# Altium PCB RGBlink.PcbDoc (part 1 of 2)
Units mm, origin at the board's own origin, x right, y up, seen from the top; angles counter-clockwise.
Board outline 49.44 x 43.42 mm, 2 copper layers (Top Layer, Bottom Layer), stack 1.621 mm thick; 48 components, 43 nets, 170 pads, 158 vias.
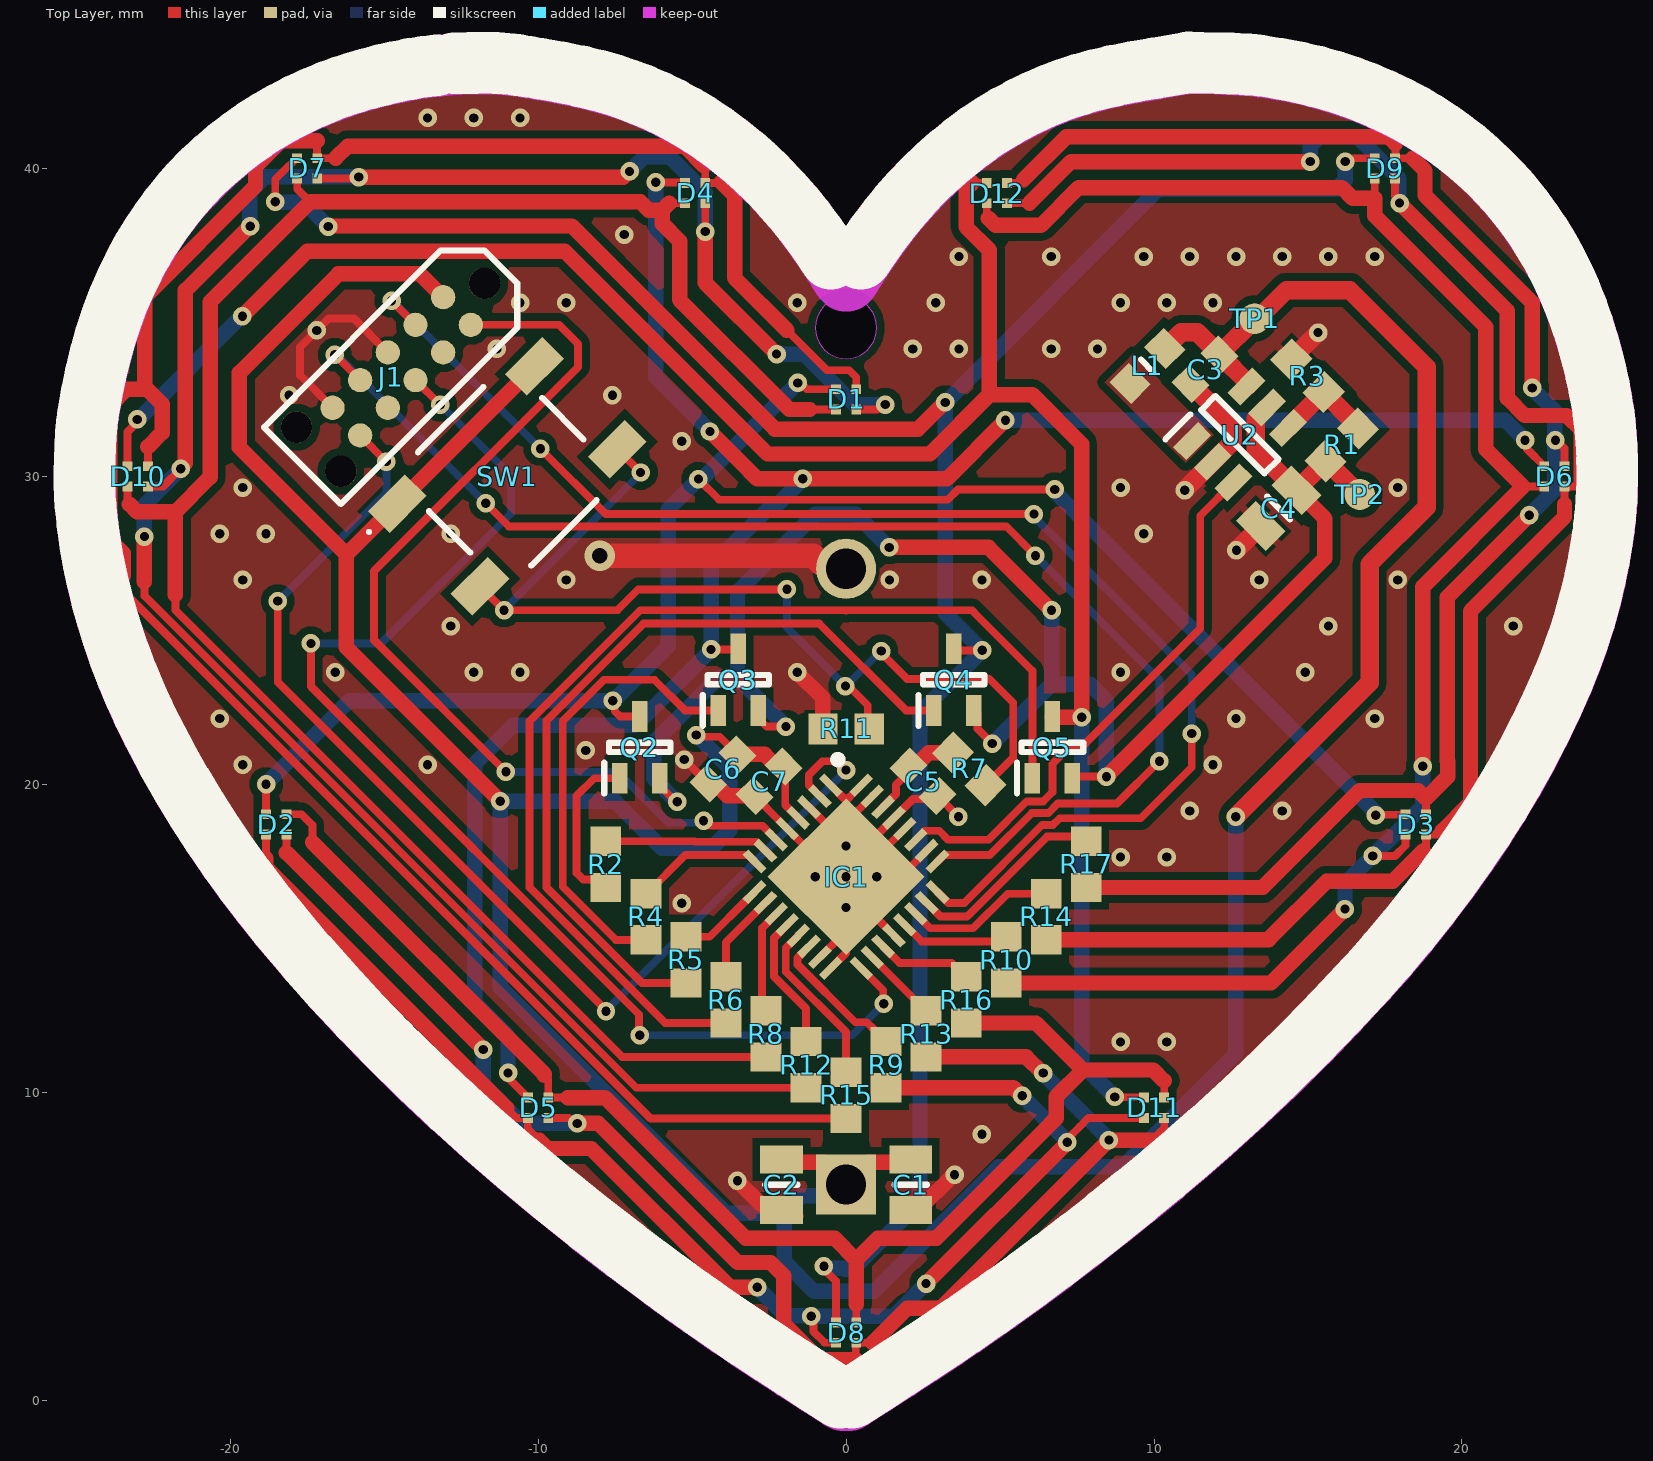
[diagram p0: Top Layer view]
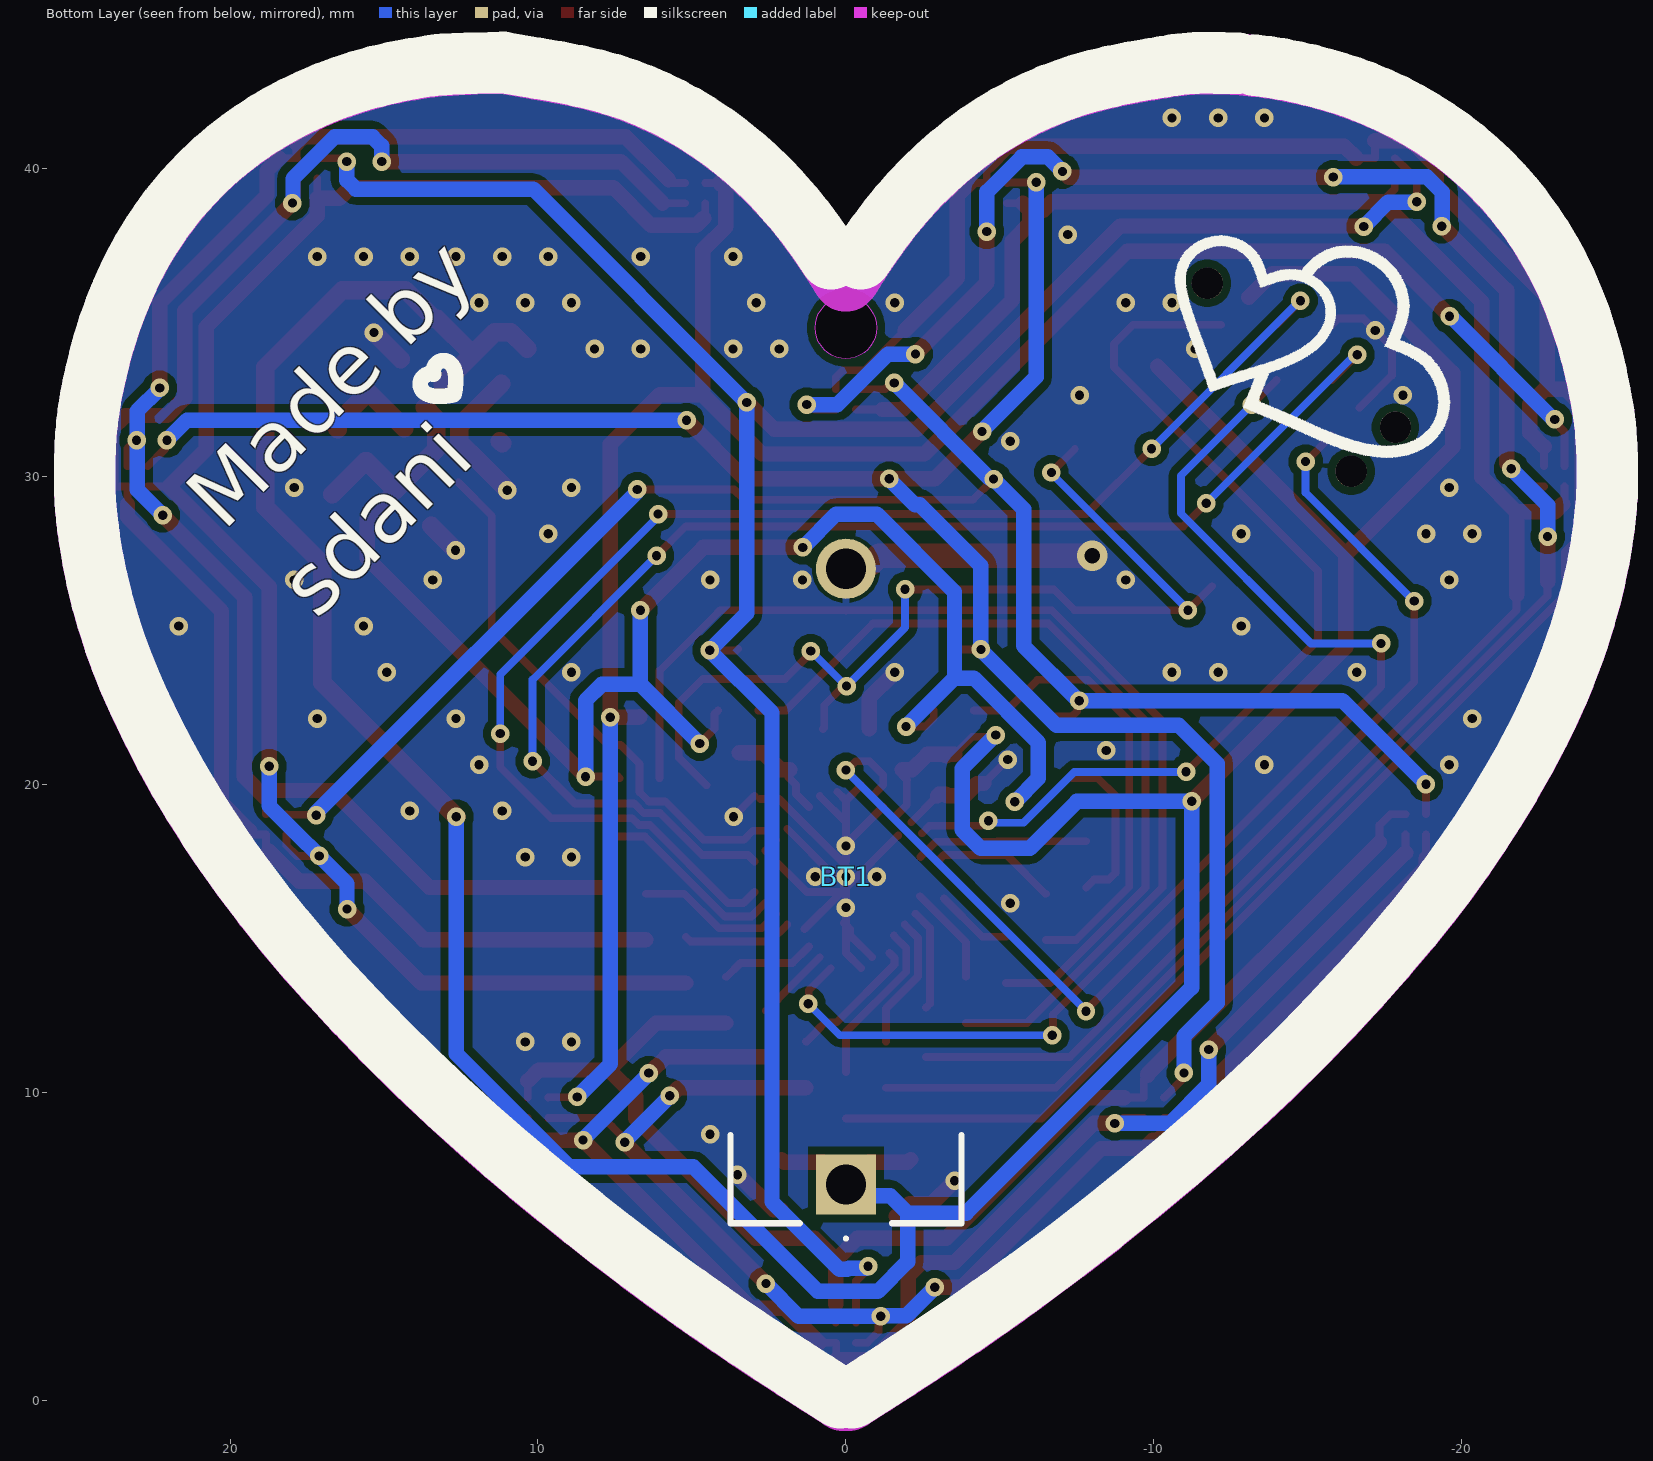
[diagram p1: Bottom Layer view, seen from below]
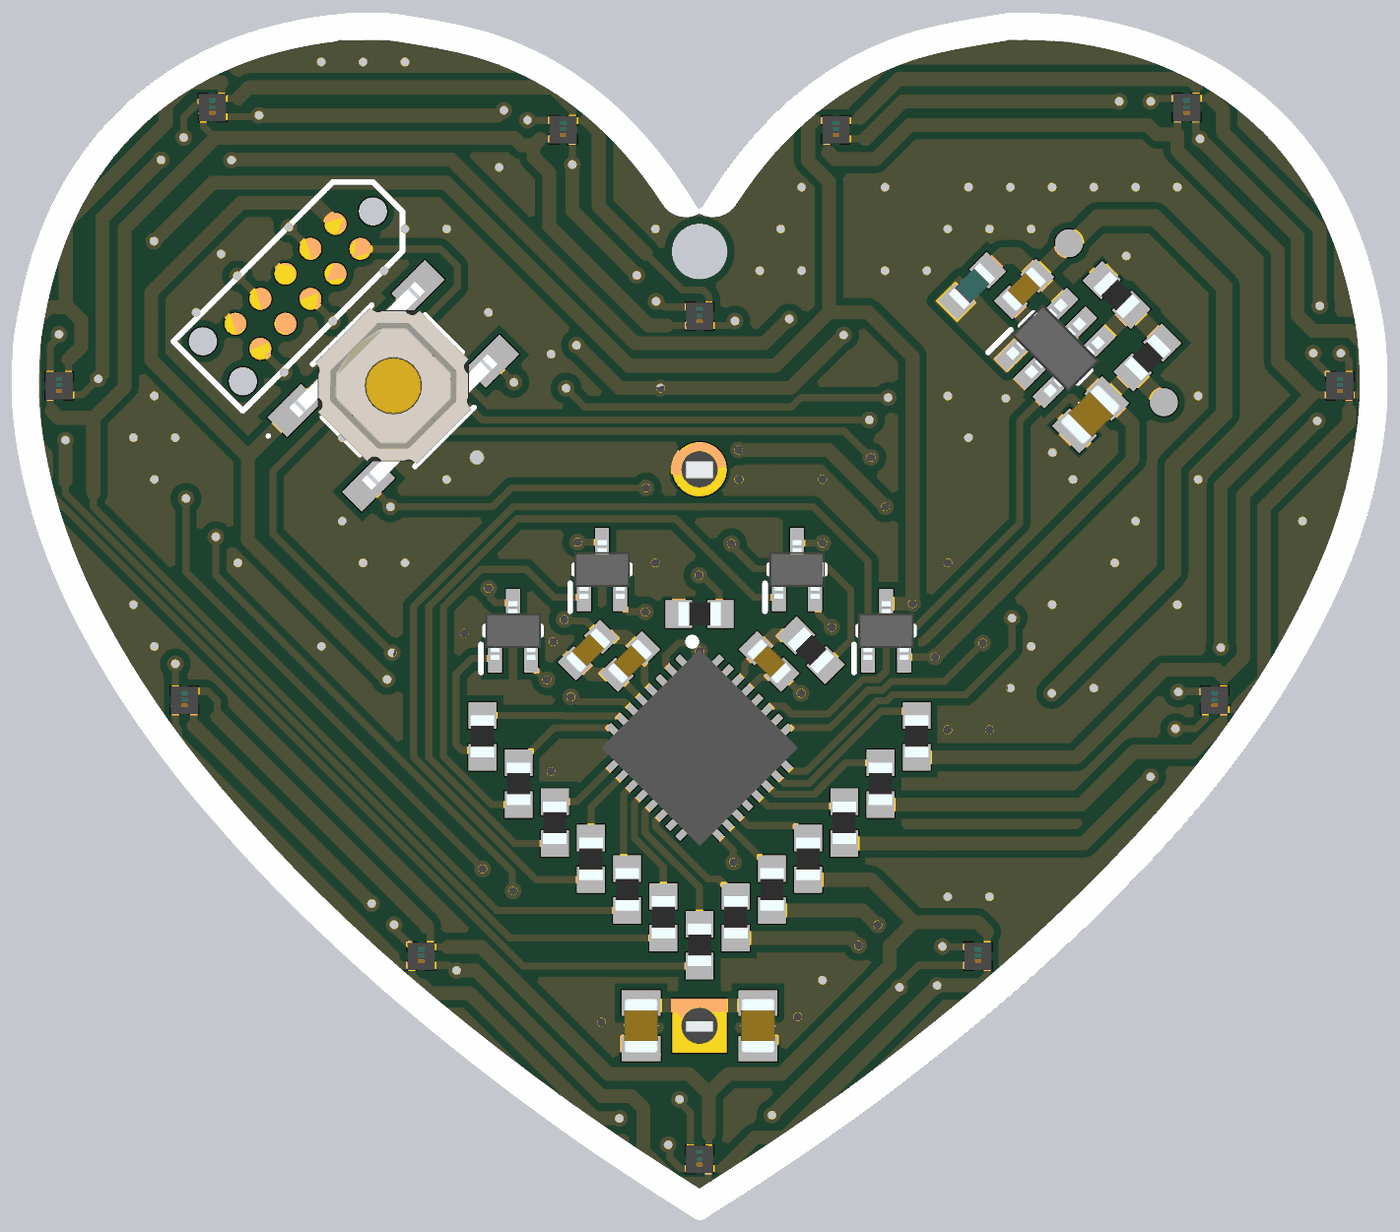
[diagram p3: 3D render of the assembled board from above, using the file's embedded part models]

## Layer stack, top to bottom
Top Solder: solder mask 0.0102, Solder Resist, Dk 3.8
Top Layer: signal copper 0.0356
Dielectric 1: dielectric 1.55, FR-4, Dk 4.8
Bottom Layer: signal copper 0.0356
Bottom Solder: solder mask 0.0102, Solder Resist, Dk 3.8

## Board outline
-23.58,24.179 cw(c-4.488,31.162) -24.303,26.619 cw(c-7.002,30.585) -24.685,29.048 cw(c-15.985,29.805) -24.717,29.707 cw(c-2.546,29.954) -24.711,30.542 cw(c-2.741,29.96) -24.674,31.363 cw(c-17.951,30.933) -24.608,31.967 cw(c-3.322,28.66) -24.352,33.326 cw(c-8.547,29.82) -24.023,34.571 cw(c-10.135,30.307) -23.615,35.723 cw(c-11.591,30.892) -23.123,36.804 cw(c-12.294,31.252) -21.957,38.648 cw(c-12.782,31.627) -20.495,40.228 cw(c-12.73,31.568) -18.76,41.515 cw(c-12.261,30.794) -16.785,42.486 cw(c-12.595,31.659) -15.967,42.768 cw(c-11.211,27.097) -15.057,43.016 cw(c-11.206,27.077) -14.133,43.211 cw(c-12.045,31.701) -13.275,43.334 ccw(c-19.728,104.362) -13.105,43.353 ccw(c-17.884,87.389) -12.949,43.37 ccw(c-18.49,92.779) -12.818,43.385 ccw(c-13.001,44.973) -12.768,43.391 cw(c-12.701,42.94) -12.712,43.396 cw(c-11.286,-19.446) -12.476,43.401 cw(c-11.761,5.768) -12.197,43.405 cw(c-11.479,-18.261) -11.882,43.408 cw(c-11.722,19.11) -11.358,43.406 cw(c-11.419,39.341) -11.029,43.388 cw(c-11.604,37.415) -10.663,43.341 cw(c-24.347,-42.839) -9.913,43.218 cw(c-14.929,13.311) -8.593,42.967 cw(c-11.276,30.41) -7.546,42.697 cw(c-10.547,32.809) -6.618,42.366 cw(c-11.546,30.38) -5.67,41.931 cw(c-10.834,31.78) -4.266,41.084 cw(c-11.749,30.483) -2.949,40.019 cw(c-12.425,29.751) -1.735,38.749 cw(c-14.135,28.311) -0.642,37.29 cw(c-33.705,15.286) -0.481,37.047 cw(c-27.486,19.359) -0.33,36.815 cw(c-26.289,20.128) -0.205,36.618 cw(c-2.006,35.479) -0.147,36.52 ccw(c0.506,36.886) -0.107,36.457 ccw(c0.326,36.76) -0.064,36.404 ccw(c0.237,36.679) -0.024,36.365 ccw(c0.005,36.399) 0.005,36.355 ccw(c0.005,36.399) 0.033,36.365 ccw(c-0.228,36.679) 0.073,36.404 ccw(c-0.317,36.76) 0.116,36.457 ccw(c-0.497,36.886) 0.156,36.52 cw(c2.015,35.479) 0.214,36.618 cw(c26.453,20.029) 0.339,36.815 cw(c27.436,19.397) 0.49,37.047 cw(c33.868,15.185) 0.651,37.29 cw(c14.145,28.31) 1.744,38.749 cw(c12.434,29.75) 2.958,40.019 cw(c11.759,30.483) 4.275,41.084 cw(c10.843,31.78) 5.679,41.931 cw(c11.461,30.565) 6.642,42.371 cw(c10.64,32.576) 7.594,42.708 cw(c11.413,30.007) 8.672,42.983 cw(c15.097,12.568) 10.028,43.238 11.139,43.422 12.095,43.401 cw(c11.621,22.214) 12.492,43.388 cw(c11.571,20.978) 12.896,43.368 cw(c11.722,23.528) 13.251,43.344 cw(c12.974,39.742) 13.479,43.319 cw(c10.947,25.4) 14.708,43.102 cw(c11.822,29.514) 15.839,42.811 cw(c12.084,30.383) 16.907,42.437 cw(c11.965,30.084) 17.945,41.97 cw(c12.621,31.387) 20.131,40.548 cw(c12.865,31.686) 21.933,38.694 cw(c12.407,31.332) 23.311,36.435 cw(c10.111,30.257) 24.243,33.819 cw(c0.736,27.894) 24.458,32.89 cw(c12.387,30.347) 24.598,32.097 cw(c13.623,30.524) 24.681,31.332 cw(c8.834,30.174) 24.72,30.491 cw(c2.25,30.042) 24.723,29.803 cw(c12.812,29.93) 24.703,29.217 cw(c13.266,29.902) 24.654,28.642 cw(c5.427,30.77) 24.57,27.989 cw(c6.112,30.67) 23.274,23.365 cw(c-4.518,35.195) 20.708,18.583 cw(c-12.53,40.47) 16.905,13.686 cw(c-32.546,58.684) 11.88,8.718 cw(c-31.81,57.857) 10.301,7.358 cw(c-52.918,83.168) 8.512,5.902 cw(c-51.36,81.208) 6.72,4.511 cw(c-25.973,47.683) 5.133,3.354 ccw(c49.166,-59.399) 5.027,3.279 ccw(c307.591,-426.359) 4.852,3.156 ccw(c370.734,-515.926) 4.651,3.014 ccw(c340.479,-473.032) 4.451,2.873 cw(c-29.203,50.535) 3.201,2.014 cw(c-57.891,93.492) 1.714,1.039 cw(c-283.016,442.685) 0.192,0.061 cw(c0.005,0.354) 0.005,0.006 cw(c0.005,0.354) -0.183,0.061 cw(c283.049,442.727) -1.705,1.039 cw(c57.909,93.505) -3.192,2.014 cw(c29.225,50.554) -4.441,2.873 ccw(c-343.689,-477.593) -4.642,3.014 ccw(c-364.801,-507.525) -4.843,3.156 ccw(c-298.414,-413.351) -5.018,3.279 ccw(c-48.765,-58.842) -5.124,3.354 cw(c0.928,11.978) -5.234,3.432 cw(c54.083,85.701) -5.434,3.576 cw(c58.928,92.384) -5.666,3.745 cw(c66.367,102.594) -5.904,3.919 cw(c45.313,73.849) -10.673,7.675 cw(c32.231,58.386) -14.847,11.525 cw(c24.865,51.054) -18.343,15.38 cw(c9.281,38.187) -21.065,19.15 cw(c5.79,35.997) -22.504,21.699 cw(c-1.921,32.1)
cut-out: -0.999,34.825 ccw(c0.001,34.825) 0.001,33.825 ccw(c0.001,34.825) 1.001,34.825 ccw(c0.001,34.825) 0.001,35.825 ccw(c0.001,34.825)

## Design rules (kind name [scope] priority, off if disabled: settings)
Clearance [All] p1: gap=0.254 ignorepadtopadclearanceinfootprint=FALSE except(0.127: Arc-Arc Arc-Track Arc-SMDPad Track-Track Track-SMDPad; 0.2: SMDPad-SMDPad Text-Text Text-Hole)
Height [All] p1: minheight=0 maxheight=40 prefheight=12.7
HoleSize [All] p1: absolutevalues=TRUE maxlimit=5 minlimit=0.3 maxpercent=80.000 minpercent=20.000
MinimumSolderMaskSliver [All] p1: minsoldermaskwidth=0.2
PlaneConnect [All] p1: pad.planeconnectstyle=Relief pad.reliefexpansion=0.508 pad.reliefentries=4 pad.reliefconductorwidth=0.254 pad.reliefairgap=0.254 via.planeconnectstyle=Direct via.reliefexpansion=0.508 via.reliefentries=4 via.reliefconductorwidth=0.254 via.reliefairgap=0.254
PolygonConnect "SW Connect" [InNet('NetL1_2')] p1: connectstyle=Direct reliefconductorwidth=0.254 reliefentries=4 polygonreliefangle="90 Angle" airgapwidth=0.254
PolygonConnect [All] p2: thpad.connectstyle=Relief thpad.reliefconductorwidth=0.254 thpad.reliefentries=4 thpad.polygonreliefangle="90 Angle" thpad.airgapwidth=0.127 smdpad.connectstyle=Relief smdpad.reliefconductorwidth=0.254 smdpad.reliefentries=4 smdpad.polygonreliefangle="90 Angle" smdpad.airgapwidth=0.127 via.connectstyle=Direct via.reliefconductorwidth=0.254 via.reliefentries=4 via.polygonreliefangle="90 Angle" via.airgapwidth=0.127
RoutingVias [All] p1: holewidth=0.5 width=0.75 viastyle="Through Hole" minholewidth=0.3 minwidth=0.5 maxholewidth=1 maxwidth=1.5
SilkToSilkClearance [All] p1: silktosilkclearance=0.15
SilkToSolderMaskClearance [IsPad] p1: minsilkscreentomaskgap=0.15 clearancetoexposedcopper=TRUE
SolderMaskExpansion SolderMaskExpansion_Vias [IsVia] p1: expansion=0.102 istentingtop=TRUE
SolderMaskExpansion [All] p2: expansion=0.05 istentingtop=FALSE
SupplyNets "Schematic Supply Nets_2" [InNet('3.3V')] p1: voltage=0.000
SupplyNets "Schematic Supply Nets_1" [InNet('GND')] p2: voltage=0.000
SupplyNets "Schematic Supply Nets" [InNet('VCC')] p3: voltage=0.000
UnRoutedNet [All] p1: checkbadconnections=TRUE
Width [All] p1: maxlimit=10 minlimit=0.2 preferedwidth=0.254 minimp=50.000000 maximp=50.000000 favimp=50.000000
23 further rules are at their usual default settings.

## Components (designator, comment, footprint, x,y, rotation, side; value= is the part's Value field where it differs from the comment)
BT1 "BAT_CR2032" BH25F1 0,7 r270 bottom
C1 "47uF" CAP0805 2.1,7 r90 top
C2 "47uF" CAP0805 -2.1,7 r90 top
C3 "4.7uF" CAP0603 11.659,33.478 r45 top
C4 "47uF" CAP0805 14.046,28.969 r45 top
C5 "100nF" CAP0603 2.5,20.1 r315 top
C6 "4.7uF" CAP0603 -4,20.5 r45 top
C7 "100nF" CAP0603 -2.5,20.1 r45 top
D1 "UHD111A-FKA-C3K23E1L3VG5ZB3Z3" UHD111A-FKA-C3K23E1L3VG5ZB3Z3 0,32.5 r0 top
D2 "UHD111A-FKA-C3K23E1L3VG5ZB3Z3" UHD111A-FKA-C3K23E1L3VG5ZB3Z3 -18.5,18.7 r0 top
D3 "UHD111A-FKA-C3K23E1L3VG5ZB3Z3" UHD111A-FKA-C3K23E1L3VG5ZB3Z3 18.5,18.7 r0 top
D4 "UHD111A-FKA-C3K23E1L3VG5ZB3Z3" UHD111A-FKA-C3K23E1L3VG5ZB3Z3 -4.9,39.2 r0 top
D5 "UHD111A-FKA-C3K23E1L3VG5ZB3Z3" UHD111A-FKA-C3K23E1L3VG5ZB3Z3 -10,9.5 r0 top
D6 "UHD111A-FKA-C3K23E1L3VG5ZB3Z3" UHD111A-FKA-C3K23E1L3VG5ZB3Z3 23,30 r0 top
D7 "UHD111A-FKA-C3K23E1L3VG5ZB3Z3" UHD111A-FKA-C3K23E1L3VG5ZB3Z3 -17.5,40 r0 top
D8 "UHD111A-FKA-C3K23E1L3VG5ZB3Z3" UHD111A-FKA-C3K23E1L3VG5ZB3Z3 0,2.2 r0 top
D9 "UHD111A-FKA-C3K23E1L3VG5ZB3Z3" UHD111A-FKA-C3K23E1L3VG5ZB3Z3 17.5,40 r0 top
D10 "UHD111A-FKA-C3K23E1L3VG5ZB3Z3" UHD111A-FKA-C3K23E1L3VG5ZB3Z3 -23,30 r0 top
D11 "UHD111A-FKA-C3K23E1L3VG5ZB3Z3" UHD111A-FKA-C3K23E1L3VG5ZB3Z3 10,9.5 r0 top
D12 "UHD111A-FKA-C3K23E1L3VG5ZB3Z3" UHD111A-FKA-C3K23E1L3VG5ZB3Z3 4.9,39.2 r0 top
IC1 "STM32C031K6U6" UFQFPN32-5x5 0,17 r315 top
J1 "TC2050" TC2050-NL -11.734,36.268 r225 top
L1 "Inductor" IND0603 9.785,33.584 r225 top value=4.7uH
Q2 "BSS84WQ-7-F" SOT-323-3 -6.7,21.2 r90 top
Q3 "BSS84WQ-7-F" SOT-323-3 -3.5,23.4 r90 top
Q4 "BSS84WQ-7-F" SOT-323-3 3.5,23.4 r90 top
Q5 "BSS84WQ-7-F" SOT-323-3 6.7,21.2 r90 top
R1 "383K" RES0603 16.097,31.02 r225 top
R2 "470R" RES0603 -7.8,17.4 r90 top
R3 "68K" RES0603 14.982,33.266 r315 top
R4 "470R" RES0603 -6.5,15.7 r90 top
R5 "470R" RES0603 -5.2,14.3 r90 top
R6 "470R" RES0603 -3.9,13 r90 top
R7 "470R" RES0603 4,20.5 r135 top
R8 "2K" RES0603 -2.6,11.9 r270 top
R9 "2K" RES0603 1.3,10.9 r270 top
R10 "2K" RES0603 5.2,14.3 r270 top
R11 "10K" RES0603 0,21.8 r0 top
R12 "1K" RES0603 -1.3,10.9 r270 top
R13 "1K" RES0603 2.6,11.9 r270 top
R14 "1K" RES0603 6.5,15.7 r270 top
R15 "1K" RES0603 0,9.9 r270 top
R16 "1K" RES0603 3.9,13 r270 top
R17 "1K" RES0603 7.8,17.4 r270 top
SW1 "TS18-5-25-SL-260-SMT-TR" BUTTON_LP_5x5 -11,30 r45 top
TP1 "Test Point" TP_PAD 13.268,35.121 r315 top
TP2 "Test Point" TP_PAD 16.68,29.411 r315 top
U2 "TLV61070ADBVR" SOT23-6 12.79,31.357 r45 top

## Footprints (in the part's own frame and the unit in brackets; to place one, negate y for a bottom-side part, rotate by r counter-clockwise, add the part's x,y. Pads: shape width x height; smd on the part's side, far side on the other; paste and mask are expansions set on the pad)
BH25F1 [mm]
  rect 1.95x1.95 hole 1.3: 1(0,0)
  round 1.95 hole 1.3: 2(-20,0)
  silkscreen extent -1.61,-3.75 1.8,3.75, body extent -23.07,-11.08 1.21,11.08, height 9
BUTTON_LP_5x5 [mm]
  rect 1.7x1 smd: 1(-3.15,1.9) 1(3.15,1.9) 2(-3.15,-1.9) 2(3.15,-1.9)
  silkscreen extent -4.5,-2.6 2.6,2.6, body extent -3.2,-2.6 3.2,2.6, height 2.5
CAP0603 [mm] "1.6 x 0.8 x 0.8 mm"
  rect 0.81x0.94 smd: 1(-0.67,0) 2(0.67,0)
  body extent -0.8,-0.4 0.8,0.4, height 0.9
CAP0805 [mm]
  rect 0.91x1.39 smd: 1(-0.82,0) 2(0.82,0)
  silkscreen extent 0,-0.53 0,0.53, body extent -1,-0.63 1,0.63, height 1.35
IND0603 [mm]
  rect 0.9x1 smd: 1(-0.8,0) 2(0.8,0)
  silkscreen extent 0,-0.3 0,0.3, body extent -0.8,-0.4 0.8,0.4, height 0.95
RES0603 [mm] "Resistor 0603 (1608 metric)"
  rect 0.95x1 smd: 1(-0.75,0) 2(0.75,0)
  body extent -0.76,-0.42 0.76,0.43, height 0.45
SOT23-6 [mm]
  rect 1.15x0.6 smd: 1(-1.25,0.95) 2(-1.25,0) 3(-1.25,-0.95) 4(1.25,-0.95) 5(1.25,0) 6(1.25,0.95)
  silkscreen extent -1.82,-1.45 0.33,1.6, body extent -1.4,-1.45 1.4,1.45, height 1.45
SOT-323-3 [mm]
  rect 1x0.5 smd: 1(-1,0.65) 2(-1,-0.65) 3(1,0)
  silkscreen extent -1.5,-1 0.15,1.15, body extent -1.05,-1 1.05,1, height 1.1
TC2050-NL [mil] "TAG CONNECT PLUG  OF NAILS VICTIM AND PLUG BODY"
  round 31 smd paste-40: 1(50,-25) 2(100,-25) 3(150,-25) 4(200,-25) 5(250,-25) 6(250,25) 7(200,25) 8(150,25) 9(100,25) 10(50,25)
  round 40 hole 40 unplated: A(0,0) B(300,40) C(300,-40)
  silkscreen extent -30,-70 330,70
TP_PAD [mm]
  round 1 smd: 1(0,0)
UFQFPN32-5x5 [mm]
  rect 0.85x0.25 smd: 1(-2.45,1.75) 2(-2.45,1.25) 3(-2.45,0.75) 4(-2.45,0.25) 5(-2.45,-0.25) 6(-2.45,-0.75) 7(-2.45,-1.25) 8(-2.45,-1.75) 17(2.45,-1.75) 18(2.45,-1.25) 19(2.45,-0.75) 20(2.45,-0.25) 21(2.45,0.25) 22(2.45,0.75) 23(2.45,1.25) 24(2.45,1.75)
  rect 0.25x0.85 smd: 9(-1.75,-2.45) 10(-1.25,-2.45) 11(-0.75,-2.45) 12(-0.25,-2.45) 13(0.25,-2.45) 14(0.75,-2.45) 15(1.25,-2.45) 16(1.75,-2.45) 25(1.75,2.45) 26(1.25,2.45) 27(0.75,2.45) 28(0.25,2.45) 29(-0.25,2.45) 30(-0.75,2.45) 31(-1.25,2.45) 32(-1.75,2.45)
  rect 3.6x3.6 smd: 33(0,0)
  silkscreen extent -3,2.38 -2.75,2.62, body extent -2.5,-2.5 2.5,2.5, height 0.6
UHD111A-FKA-C3K23E1L3VG5ZB3Z3 [mm] "RGB 1x1mm LED"
  rect 0.32x0.32 smd: 1(0.33,0.33) 2(0.33,-0.331) 3(-0.331,-0.331) 4(-0.331,0.33)
  body extent -0.5,-0.5 0.5,0.5, height 0.6

## Part data
BT1: "CR2032 isolated battery holder / BH-25F-1", Arrow Part Number=BH-25F-1, Manufacturer_Name="Adam Tech", Supplier Part Number=737-BH-25F-1, Arrow Price/Stock=https://www.arrow.com/en/products/bh-25f-1/adam-tech?region=europe, Datasheet Link=https://app.adam-tech.com/products/download/data_sheet/196966/bh-25f-1-data-sheet.pdf, Height=9.5mm, Manufacturer_Part_Number=BH-25F-1, Mouser Price/Stock=https://www.mouser.co.uk/ProductDetail/Adam-Tech/BH-25F-1?qs=HoCaDK9Nz5dcCnxRauSciw%3D%3D
C1 C2 C4 C5 C7: "Ceramic Capacitor, Multilayer, Ceramic, 6.3V, 20% +Tol, 20% -Tol, X5R, 15% TC, 47uF, Surface Mount, 0805", Capacitor Type=Ceramic, Case/Package=0805, Manufacturer=Samsung, Manufacturer Part Number=CL21A476MQYNNNE, Max Operating Temperature=85°C, Min Operating Temperature=-55°C, Package Shape=Rectangular, Package Style=SMTMeter, Rated DC Voltage (URdc)=6.3V, Supplier Part Number=187-CL21A476MQYNNNE, Temperature Characteristics Code=X5R, Tolerance  (fill in as +-)=20%, Category="Ceramic Capacitors", ComponentLink1Description=https://datasheet.ciiva.com:443/pdfs/VipMasterIC/IC/SEMS/SEMS-S-A0008384515/SEMS-S-A0008898940-1.pdf?src-supplier=IHS+Markit, ComponentLink1URL=https://datasheet.ciiva.com:443/pdfs/VipMasterIC/IC/SEMS/SEMS-S-A0008384515/SEMS-S-A0008898940-1.pdf?src-supplier=IHS+Markit, ComponentLink2Description=https://datasheet.ciiva.com/25791/cl21a476mqynnne-25791153.pdf?src-supplier=Digikey, ComponentLink2URL=https://datasheet.ciiva.com/25791/cl21a476mqynnne-25791153.pdf?src-supplier=Digikey, ComponentLink3Description=https://datasheet.ciiva.com/26838/getdatasheetpartid-359050-26838632.pdf?src-supplier=Verical, ComponentLink3URL=https://datasheet.ciiva.com/26838/getdatasheetpartid-359050-26838632.pdf?src-supplier=Verical, Dielectric Material=Ceramic, Height=1.25mm, JESD-609 Code=e3, Length=2mm, Mounting Technology="Surface Mount", Multilayer=Yes, Packaging="Tape and Reel", Pins=2, Pricing="1=0.18, 10=0.073, 50=0.073, 100=0.063, 1000=0.052, 10000=0.041 (USD)", Reach SVHC Compliant=Yes, RoHS=Yes, RoHS Compliant=Yes, Stock=210015, Supplier=Mouser, Terminal Finish=Nickel, Termination=Wraparound, Tolerance (fill in as +-)=20%, Width=1.25mm
C3 C6: "Capacitor", Supplier Part Number=187-CL10A475KP8NNWC
D1 D2 D3 D4 D5 D6 D7 D8 D9 D10 D11 D12: Supplier Part Number=941-UHD1AA3K3E3V53Z3
IC1: "Integrated Circuit", Manufacturer_Name=STMicroelectronics, Supplier Part Number=511-STM32C031K6U6, Arrow Part Number=STM32C031K6U6, Arrow Price/Stock=https://www.arrow.com/en/products/stm32c031k6u6/stmicroelectronics?region=nac, Datasheet Link=https://www.st.com/resource/en/datasheet/stm32c031c4.pdf, Height=0.6mm, Manufacturer_Part_Number=STM32C031K6U6, Mouser Price/Stock=https://www.mouser.co.uk/ProductDetail/STMicroelectronics/STM32C031K6U6?qs=IPgv5n7u5QaHL3ukKksvIA%3D%3D
J1: "TC2050 JTAG CONNECTOR DNP"
L1: library part 4.7uH, "General Purpose Inductor, 4.7uH, 20%, 1 Element, Ferrite-Core, SMD, 1608M", Case/Size Code=1608-M, DC Resistance (DCR)=500mR, Inductor Application="POWER INDUCTOR", Inductor Type="GENERAL PURPOSE INDUCTOR", Manufacturer=TDK, Manufacturer Part Number=MLZ1608E4R7MT, Manufacturer Series=MLZ, Max Current Rating=350mA, Max Operating Temperature=125°C, Min Operating Temperature=-55°C, Package Height=0.8mm, Package Length=1.6mm, Package Style=SMTMeter, Self Resonant Frequency=80MHz, Supplier Part Number=810-MLZ1608E4R7MT, Test Frequency=2MHz, Tolerance=20%, Category="Fixed Inductors", Channels=1, ComponentLink1Description=https://datasheet.ciiva.com:443/pdfs/VipMasterIC/IC/TDKC/TDKCS08829/TDKCS08829-1.pdf?src-supplier=IHS+Markit, ComponentLink1URL=https://datasheet.ciiva.com:443/pdfs/VipMasterIC/IC/TDKC/TDKCS08829/TDKCS08829-1.pdf?src-supplier=IHS+Markit, ComponentLink2Description=https://datasheet.ciiva.com/11802/0900766b8082f86f-11802261.pdf?src-supplier=Rs, ComponentLink2URL=https://datasheet.ciiva.com/11802/0900766b8082f86f-11802261.pdf?src-supplier=Rs, Construction="Magnetic Shielded", Core Material=Ferrite, Inductance-Nom (L)=4.7uH, JESD-609 Code=e3, Package Width=0.8mm, Packaging="Tape and Reel", Pins=2, Pricing="1=0.1, 10=0.063, 50=0.063, 100=0.053, 1000=0.047, 10000=0.038 (USD)", Reach SVHC Compliant=Yes, RoHS=Yes, RoHS Compliant=Yes, Series=MLZ1608, Shape/Size Description="RECTANGULAR PACKAGE", Shielding=Shielded, Stock=10382, Supplier=Mouser, Surface Mount=Yes, Terminal Finish=Tin, Terminal Placement="Dual Ended", Termination=Wraparound
Q2 Q3 Q4 Q5: "MOSFET (P-Channel)", Manufacturer_Name="Diodes Incorporated", Supplier Part Number=621-BSS84WQ-7-F, Arrow Part Number=BSS84WQ-7-F, Arrow Price/Stock=https://www.arrow.com/en/products/bss84wq-7-f/diodes-incorporated?region=nac, Datasheet Link=https://www.diodes.com//assets/Datasheets/BSS84WQ.pdf, Height=1.1mm, Manufacturer_Part_Number=BSS84WQ-7-F, Mouser Price/Stock=https://www.mouser.co.uk/ProductDetail/Diodes-Incorporated/BSS84WQ-7-F?qs=wtVJq%252Be05r%252B5TZHG3xVH8w%3D%3D
R1: "Fixed Resistor, Metal Glaze/thick Film, 0.1W, 383000ohm, 75V, 1% +/-Tol, 100ppm/Cel, Surface Mount, 0603", Case/Package=0603, Manufacturer=Vishay, Manufacturer Part Number=CRCW0603383KFKEA, Max Operating Temperature=155°C, Min Operating Temperature=-55°C, Package Height=0.45mm, Package Length=1.55mm, Package Shape=Rectangular, Package Width=0.85mm, Rated Temperature=70°C, Resistor Type="FIXED RESISTOR", Supplier Part Number=71-CRCW0603-383K-E3, Temperature Coefficient (ppm/Cel)=100, Working Voltage=75V, Category="Chip SMD Resistors", ComponentLink1Description=https://datasheet.ciiva.com:443/pdfs/VipMasterIC/IC/VISH/VISH-S-A0007266705/VISH-S-A0007266705-1.pdf?src-supplier=IHS+Markit, ComponentLink1URL=https://datasheet.ciiva.com:443/pdfs/VipMasterIC/IC/VISH/VISH-S-A0007266705/VISH-S-A0007266705-1.pdf?src-supplier=IHS+Markit, ComponentLink2Description=https://datasheet.ciiva.com/16204/dcrcwe3-16204191.pdf?src-supplier=Future+Electronics, ComponentLink2URL=https://datasheet.ciiva.com/16204/dcrcwe3-16204191.pdf?src-supplier=Future+Electronics, ComponentLink3Description=https://datasheet.ciiva.com/5543/dcrcwe3-109170-5543275.pdf?src-supplier=Mouser, ComponentLink3URL=https://datasheet.ciiva.com/5543/dcrcwe3-109170-5543275.pdf?src-supplier=Mouser, ComponentLink4Description=https://datasheet.ciiva.com/7674/1697337-7674088.pdf?src-supplier=Element14, ComponentLink4URL=https://datasheet.ciiva.com/7674/1697337-7674088.pdf?src-supplier=Element14, ComponentLink5Description=https://datasheet.ciiva.com/7674/1697337-7674089.pdf?src-supplier=Element14, ComponentLink5URL=https://datasheet.ciiva.com/7674/1697337-7674089.pdf?src-supplier=Element14, ComponentLink6Description=https://datasheet.ciiva.com/7792/125364-7792239.pdf?src-supplier=Element14, ComponentLink6URL=https://datasheet.ciiva.com/7792/125364-7792239.pdf?src-supplier=Element14, ComponentLink7Description=https://datasheet.ciiva.com/2466/dcrcwe3-2466635.pdf?src-supplier=Digikey, ComponentLink7URL=https://datasheet.ciiva.com/2466/dcrcwe3-2466635.pdf?src-supplier=Digikey, ComponentLink8Description=https://datasheet.ciiva.com/2466/dcrcwe3-2466636.pdf?src-supplier=Digikey, ComponentLink8URL=https://datasheet.ciiva.com/2466/dcrcwe3-2466636.pdf?src-supplier=Digikey, ComponentLink9Description=https://datasheet.ciiva.com/2466/dcrcwe3-2466637.pdf?src-supplier=Digikey, ComponentLink9URL=https://datasheet.ciiva.com/2466/dcrcwe3-2466637.pdf?src-supplier=Digikey, Construction=Chip, JESD-609 Code=e3, Mounting Technology="Surface Mount", Packaging="Tape and Reel", Pins=2, Pricing="1=0.1, 10=0.017, 50=0.017, 100=0.014, 1000=0.008, 10000=0.004 (USD)", Reach SVHC Compliant=Yes, Reference Standard=AEC-Q200, RoHS=Yes, RoHS Compliant=Yes, Stock=18992, Technology="METAL GLAZE/THICK FILM", Terminal Finish=Nickel, Termination=Wraparound
R2 R4 R5 R6 R7: "Fixed Resistor, Metal Glaze/thick Film, 0.1W, 470ohm, 75V, 1% +/-Tol, 100ppm/Cel, Surface Mount, 0603", Case/Package=0603, Manufacturer=Yageo, Manufacturer Part Number=RC0603FR-07470RL, Max Operating Temperature=155°C, Min Operating Temperature=-55°C, Package Height=0.45mm, Package Length=1.6mm, Package Shape=Rectangular, Package Width=0.8mm, Rated Temperature=70°C, Resistor Type="FIXED RESISTOR", Supplier Part Number=603-RC0603FR-07470RL, Temperature Coefficient (ppm/Cel)=100, Working Voltage=75V, Additional Feature="LASER TRIMMABLE", Category="Chip SMD Resistors", ComponentLink1Description=https://datasheet.ciiva.com:443/pdfs/VipMasterIC/IC/YAGO/YAGO-S-A0008145938/YAGO-S-A0008145938-1.pdf?src-supplier=IHS+Markit, ComponentLink1URL=https://datasheet.ciiva.com:443/pdfs/VipMasterIC/IC/YAGO/YAGO-S-A0008145938/YAGO-S-A0008145938-1.pdf?src-supplier=IHS+Markit, ComponentLink2Description=https://datasheet.ciiva.com/11808/0900766b80f96399-11808177.pdf?src-supplier=Rs, ComponentLink2URL=https://datasheet.ciiva.com/11808/0900766b80f96399-11808177.pdf?src-supplier=Rs, ComponentLink3Description=https://datasheet.ciiva.com/7660/1868787-7660793.pdf?src-supplier=Element14, ComponentLink3URL=https://datasheet.ciiva.com/7660/1868787-7660793.pdf?src-supplier=Element14, ComponentLink4Description=https://datasheet.ciiva.com/46440/1868787-46440907.pdf?src-supplier=Element14, ComponentLink4URL=https://datasheet.ciiva.com/46440/1868787-46440907.pdf?src-supplier=Element14, ComponentLink5Description=https://datasheet.ciiva.com/2454/pyu-r-int-thick-7-2454013.pdf?src-supplier=Digikey, ComponentLink5URL=https://datasheet.ciiva.com/2454/pyu-r-int-thick-7-2454013.pdf?src-supplier=Digikey, ComponentLink6Description=https://datasheet.ciiva.com/2454/pyu-r-int-thick-7-2454014.pdf?src-supplier=Digikey, ComponentLink6URL=https://datasheet.ciiva.com/2454/pyu-r-int-thick-7-2454014.pdf?src-supplier=Digikey, ComponentLink7Description=https://datasheet.ciiva.com/2454/pyu-r-int-thick-7-2454012.pdf?src-supplier=Digikey, ComponentLink7URL=https://datasheet.ciiva.com/2454/pyu-r-int-thick-7-2454012.pdf?src-supplier=Digikey, ComponentLink8Description=https://datasheet.ciiva.com/7746/1738695-7746360.pdf?src-supplier=Element14, ComponentLink8URL=https://datasheet.ciiva.com/7746/1738695-7746360.pdf?src-supplier=Element14, ComponentLink9Description=https://datasheet.ciiva.com/7746/1738695-7746359.pdf?src-supplier=Element14, ComponentLink9URL=https://datasheet.ciiva.com/7746/1738695-7746359.pdf?src-supplier=Element14, Construction=Chip, JESD-609 Code=e3, Mounting Technology="Surface Mount", Packaging="Tape and Reel", Pins=2, Pricing="1=0.1, 10=0.008, 50=0.008, 100=0.007, 1000=0.006, 10000=0.002 (USD)", Reach SVHC Compliant=Yes, RoHS=Yes, RoHS Compliant=Yes, Stock=609861, Technology="METAL GLAZE/THICK FILM", Terminal Finish=Nickel, Termination=Wraparound
R3: "Fixed Resistor, Metal Glaze/thick Film, 0.1W, 68000ohm, 50V, 1% +/-Tol, 100ppm/Cel, Surface Mount, 0603", Case/Package=0603, Manufacturer="TE Connectivity", Manufacturer Part Number=CRG0603F68K, Manufacturer Series=CRG, Max Operating Temperature=125°C, Min Operating Temperature=-55°C, Package Shape=Rectangular, Rated Temperature=70°C, Resistor Type="FIXED RESISTOR", Supplier Part Number=279-CRG0603F68K, Temperature Coefficient (ppm/Cel)=100, Working Voltage=50V, Additional Feature="LASER TRIMMABLE", Category="Chip SMD Resistors", ComponentLink1Description=https://datasheet.ciiva.com:443/pdfs/VipMasterIC/IC/TYEC/TYECS00469/TYECS00469-1.pdf?src-supplier=IHS+Markit, ComponentLink1URL=https://datasheet.ciiva.com:443/pdfs/VipMasterIC/IC/TYEC/TYECS00469/TYECS00469-1.pdf?src-supplier=IHS+Markit, ComponentLink2Description=https://datasheet.ciiva.com/2529/eng-cd-1622987-ba-2529849.pdf?src-supplier=Digikey, ComponentLink2URL=https://datasheet.ciiva.com/2529/eng-cd-1622987-ba-2529849.pdf?src-supplier=Digikey, ComponentLink3Description=https://datasheet.ciiva.com/11811/0900766b800a696e-11811113.pdf?src-supplier=Rs, ComponentLink3URL=https://datasheet.ciiva.com/11811/0900766b800a696e-11811113.pdf?src-supplier=Rs, ComponentLink4Description=https://datasheet.ciiva.com/30183/eng-ds-1773204-e-30183934.pdf?src-supplier=Onlinecomponents.com, ComponentLink4URL=https://datasheet.ciiva.com/30183/eng-ds-1773204-e-30183934.pdf?src-supplier=Onlinecomponents.com, ComponentLink5Description=https://datasheet.ciiva.com/5562/eng-ds-1773204-g-5562568.pdf?src-supplier=Mouser, ComponentLink5URL=https://datasheet.ciiva.com/5562/eng-ds-1773204-g-5562568.pdf?src-supplier=Mouser, ComponentLink6Description=https://datasheet.ciiva.com/24412/eng-ds-1773204-e-24412331.pdf?src-supplier=Onlinecomponents.com, ComponentLink6URL=https://datasheet.ciiva.com/24412/eng-ds-1773204-e-24412331.pdf?src-supplier=Onlinecomponents.com, JESD-609 Code=e3, Mounting Technology="Surface Mount", Packaging="Tape and Reel", Pins=2, Pricing="1=0.1, 10=0.019, 50=0.019, 100=0.011, 1000=0.006, 10000=0.004 (USD)", RoHS=Yes, RoHS Compliant=Yes, Stock=24887, Technology="METAL GLAZE/THICK FILM", Terminal Finish=Tin, Termination=Wraparound
R8 R9 R10: "Fixed Resistor, Metal Glaze/thick Film, 0.1W, 2000ohm, 75V, 1% +/-Tol, 100ppm/Cel, Surface Mount, 0603", Case/Package=0603, Manufacturer="Stackpole Electronics", Manufacturer Part Number=RMCF0603FG2K00, Max Operating Temperature=155°C, Min Operating Temperature=-55°C, Package Height=0.45mm, Package Length=1.55mm, Package Shape=Rectangular, Package Width=0.8mm, Rated Temperature=70°C, Resistor Type="FIXED RESISTOR", Supplier Part Number=708-RMCF0603FG2K00, Temperature Coefficient (ppm/Cel)=100, Working Voltage=75V, Category="Chip SMD Resistors", ComponentLink1Description=https://datasheet.ciiva.com:443/pdfs/VipMasterIC/IC/SEIE/SEIE-S-A0009541969/SEIE-S-A0009541969-1.pdf?src-supplier=IHS+Markit, ComponentLink1URL=https://datasheet.ciiva.com:443/pdfs/VipMasterIC/IC/SEIE/SEIE-S-A0009541969/SEIE-S-A0009541969-1.pdf?src-supplier=IHS+Markit, ComponentLink2Description=https://www.seielect.com/catalog/sei-rmcf_rmcp.pdf?src-supplier=Digikey, ComponentLink2URL=https://www.seielect.com/catalog/sei-rmcf_rmcp.pdf?src-supplier=Digikey, ComponentLink3Description=https://www.seielect.com/catalog/SEI-RMCF_RMCP.pdf?src-supplier=Avnet, ComponentLink3URL=https://www.seielect.com/catalog/SEI-RMCF_RMCP.pdf?src-supplier=Avnet, Construction=Rectangular, JESD-609 Code=e3, Mounting Technology="Surface Mount", Packaging="Tape and Reel", Pins=2, Pricing="1=0.1, 10=0.009, 50=0.009, 100=0.008, 1000=0.004, 10000=0.002 (USD)", Reach SVHC Compliant=Yes, Reference Standard=AEC-Q200, RoHS=Yes, RoHS Compliant=Yes, Stock=24767, Technology="METAL GLAZE/THICK FILM", Terminal Finish=Nickel, Termination=Wraparound
R11: "Fixed Resistor, Metal Glaze/thick Film, 0.1W, 10000ohm, 75V, 1% +/-Tol, 100ppm/Cel, Surface Mount, 0603", Case/Package=0603, Manufacturer=Bourns, Manufacturer Part Number=CR0603-FX-1002ELF, Max Operating Temperature=155°C, Min Operating Temperature=-55°C, Package Height=0.45mm, Package Length=1.6mm, Package Shape=Rectangular, Package Width=0.8mm, Rated Temperature=70°C, Resistor Type="FIXED RESISTOR", Supplier Part Number=652-CR0603FX-1002ELF, Temperature Coefficient=100ppm/°C, Working Voltage=50V, Category="Chip SMD Resistors", ComponentLink1Description=https://datasheet.ciiva.com:443/pdfs/VipMasterIC/IC/BOUR/BOUR-S-A0009069624/BOUR-S-A0009069624-1.pdf?src-supplier=IHS+Markit, ComponentLink1URL=https://datasheet.ciiva.com:443/pdfs/VipMasterIC/IC/BOUR/BOUR-S-A0009069624/BOUR-S-A0009069624-1.pdf?src-supplier=IHS+Markit, ComponentLink2Description=https://datasheet.ciiva.com/11808/0900766b80fcdb72-11808032.pdf?src-supplier=Rs, ComponentLink2URL=https://datasheet.ciiva.com/11808/0900766b80fcdb72-11808032.pdf?src-supplier=Rs, ComponentLink3Description=https://datasheet.ciiva.com/27049/774903-27049975.pdf?src-supplier=Jameco, ComponentLink3URL=https://datasheet.ciiva.com/27049/774903-27049975.pdf?src-supplier=Jameco, ComponentLink4Description=https://datasheet.ciiva.com/22644/1849498-22644171.pdf?src-supplier=Element14, ComponentLink4URL=https://datasheet.ciiva.com/22644/1849498-22644171.pdf?src-supplier=Element14, ComponentLink5Description=https://datasheet.ciiva.com/22693/1902866-22693206.pdf?src-supplier=Element14, ComponentLink5URL=https://datasheet.ciiva.com/22693/1902866-22693206.pdf?src-supplier=Element14, ComponentLink6Description=https://datasheet.ciiva.com/5548/chpreztr-5548911.pdf?src-supplier=Mouser, ComponentLink6URL=https://datasheet.ciiva.com/5548/chpreztr-5548911.pdf?src-supplier=Mouser, ComponentLink7Description=https://datasheet.ciiva.com/16757/70154685-16757483.pdf?src-supplier=Allied+Electronics, ComponentLink7URL=https://datasheet.ciiva.com/16757/70154685-16757483.pdf?src-supplier=Allied+Electronics, ComponentLink8Description=https://datasheet.ciiva.com/3255/chpreztr-3255918.pdf?src-supplier=Avnet, ComponentLink8URL=https://datasheet.ciiva.com/3255/chpreztr-3255918.pdf?src-supplier=Avnet, ComponentLink9Description=https://datasheet.ciiva.com/7001/1902866-7001623.pdf?src-supplier=Newark, ComponentLink9URL=https://datasheet.ciiva.com/7001/1902866-7001623.pdf?src-supplier=Newark, Construction=Chip, JESD-609 Code=e3, Mounting Technology="Surface Mount", Packaging="Tape and Reel", Pins=2, Pricing="1=0.1, 10=0.009, 50=0.009, 100=0.005, 1000=0.004, 10000=0.002 (USD)", Reach SVHC Compliant=Yes, RoHS=Yes, RoHS Compliant=Yes, Stock=335503, Technology="RUTHENIUM OXIDE", Terminal Finish=Nickel, Termination=Wraparound
R12 R13 R14 R15 R16 R17: "Fixed Resistor, Metal Glaze/thick Film, 0.1W, 1000ohm, 75V, 1% +/-Tol, 100ppm/Cel, Surface Mount, 0603", Case/Package=0603, Manufacturer=Bourns, Manufacturer Part Number=CR0603-FX-1001ELF, Max Operating Temperature=155°C, Min Operating Temperature=-55°C, Package Height=0.45mm, Package Length=1.6mm, Package Shape=Rectangular, Package Width=0.8mm, Rated Temperature=70°C, Resistor Type="FIXED RESISTOR", Supplier Part Number=652-CR0603FX-1001ELF, Temperature Coefficient=100ppm/°C, Working Voltage=50V, Category="Chip SMD Resistors", ComponentLink1Description=https://datasheet.ciiva.com:443/pdfs/VipMasterIC/IC/BOUR/BOUR-S-A0009069624/BOUR-S-A0009069624-1.pdf?src-supplier=IHS+Markit, ComponentLink1URL=https://datasheet.ciiva.com:443/pdfs/VipMasterIC/IC/BOUR/BOUR-S-A0009069624/BOUR-S-A0009069624-1.pdf?src-supplier=IHS+Markit, ComponentLink2Description=https://datasheet.ciiva.com/11808/0900766b80fcdb72-11808035.pdf?src-supplier=Rs, ComponentLink2URL=https://datasheet.ciiva.com/11808/0900766b80fcdb72-11808035.pdf?src-supplier=Rs, ComponentLink3Description=https://datasheet.ciiva.com/19466/774882-19466523.pdf?src-supplier=Jameco, ComponentLink3URL=https://datasheet.ciiva.com/19466/774882-19466523.pdf?src-supplier=Jameco, ComponentLink4Description=https://datasheet.ciiva.com/7001/1902866-7001622.pdf?src-supplier=Newark, ComponentLink4URL=https://datasheet.ciiva.com/7001/1902866-7001622.pdf?src-supplier=Newark, ComponentLink5Description=https://datasheet.ciiva.com/7986/691949-7986156.pdf?src-supplier=Element14, ComponentLink5URL=https://datasheet.ciiva.com/7986/691949-7986156.pdf?src-supplier=Element14, ComponentLink6Description=https://datasheet.ciiva.com/22693/1902866-22693205.pdf?src-supplier=Element14, ComponentLink6URL=https://datasheet.ciiva.com/22693/1902866-22693205.pdf?src-supplier=Element14, ComponentLink7Description=https://datasheet.ciiva.com/5546/chpreztr-5546283.pdf?src-supplier=Mouser, ComponentLink7URL=https://datasheet.ciiva.com/5546/chpreztr-5546283.pdf?src-supplier=Mouser, ComponentLink8Description=https://datasheet.ciiva.com/16757/70154685-16757482.pdf?src-supplier=Allied+Electronics, ComponentLink8URL=https://datasheet.ciiva.com/16757/70154685-16757482.pdf?src-supplier=Allied+Electronics, ComponentLink9Description=https://datasheet.ciiva.com/3255/chpreztr-3255917.pdf?src-supplier=Avnet, ComponentLink9URL=https://datasheet.ciiva.com/3255/chpreztr-3255917.pdf?src-supplier=Avnet, ComponentLink10Description=https://datasheet.ciiva.com/6547/chpreztr-6547350.pdf?src-supplier=Digikey, ComponentLink10URL=https://datasheet.ciiva.com/6547/chpreztr-6547350.pdf?src-supplier=Digikey, ComponentLink11Description=https://datasheet.ciiva.com/6547/chpreztr-6547351.pdf?src-supplier=Digikey, ComponentLink11URL=https://datasheet.ciiva.com/6547/chpreztr-6547351.pdf?src-supplier=Digikey, ComponentLink12Description=https://datasheet.ciiva.com/6547/chpreztr-6547349.pdf?src-supplier=Digikey, ComponentLink12URL=https://datasheet.ciiva.com/6547/chpreztr-6547349.pdf?src-supplier=Digikey, ComponentLink13Description=https://datasheet.ciiva.com/30115/159chpreztr-30115222.pdf?src-supplier=Onlinecomponents.com, ComponentLink13URL=https://datasheet.ciiva.com/30115/159chpreztr-30115222.pdf?src-supplier=Onlinecomponents.com, Construction=Chip, JESD-609 Code=e3, Mounting Technology="Surface Mount", Packaging="Tape and Reel", Pins=2, Pricing="1=0.1, 10=0.009, 50=0.009, 100=0.005, 1000=0.004, 10000=0.002 (USD)", Reach SVHC Compliant=Yes, RoHS=Yes, RoHS Compliant=Yes, Stock=320220, Technology="RUTHENIUM OXIDE", Terminal Finish=Nickel, Termination=Wraparound
SW1: "Switch", Manufacturer_Name="Same Sky", Supplier Part Number=179-TS18525SL260SMTT, Datasheet Link=https://www.sameskydevices.com/product/resource/supplyframepdf/ts18.pdf, Height=2.7mm, Manufacturer_Part_Number=TS18-5-25-SL-260-SMT-TR, Mouser Price/Stock=https://www.mouser.co.uk/ProductDetail/Same-Sky/TS18-5-25-SL-260-SMT-TR?qs=tlsG%2FOw5FFh0yS4gYnfcwg%3D%3D
U2: "Integrated Circuit", Manufacturer_Name="Texas Instruments", Supplier Part Number=595-TLV61070ADBVR, Arrow Part Number=TLV61070ADBVR, Arrow Price/Stock=https://www.arrow.com/en/products/tlv61070adbvr/texas-instruments?utm_currency=USD&region=nac, Datasheet Link=https://www.ti.com/lit/ds/symlink/tlv61070a.pdf?HQS=dis-mous-null-mousermode-dsf-pf-null-wwe&ts=1668211309833&ref_url=https%253A%252F%252Fwww.mouser.com%252F, Height=1.45mm, Manufacturer_Part_Number=TLV61070ADBVR, Mouser Price/Stock=https://www.mouser.co.uk/ProductDetail/Texas-Instruments/TLV61070ADBVR?qs=T%252BzbugeAwjhLlT1empixsw%3D%3D

## Via types
v1: diameter 0.6, hole 0.3, Top Layer to Bottom Layer, tented both sides, 157 vias
v2: diameter 1, hole 0.5, Top Layer to Bottom Layer, tented both sides, 1 vias

## Nets (pads, with @x,y where several pads share a name; then routed paths per layer and width w, separated by ;. In a path a pad name is that pad's centre, name@x,y a point inside that pad or via, vN(x,y) a via of type N, cw(c..) or ccw(c..) an arc to the next point about the centre after c; other vN are vias at no path point)
3.3V: C4.2 Q2.2 Q3.2 Q4.2 Q5.2 R1.2 TP2.1 U2.5 | length 56.6
  Top Layer w0.254: Q2.2@-6.05,20.2 -6.05,19.95 -5.534,19.434 v1(-5.484,19.434) ; Q3.2@-2.85,22.4 -2.85,22.15 -2.575,21.875 v1(-1.95,21.875) ; Q4.2@4.15,22.4 4.268,22.282 4.268,21.807 v1(4.75,21.325) ; Q5.2@7.35,20.2 7.4,20.25 v1(8.454,20.25)
  Top Layer w0.5: v1(1.4,27.694) 4.631,27.694 v1(6.675,25.65) ; v1(8.454,20.25) 15.55,27.346 15.55,28.625 C4.2@14.626,29.549
  Top Layer w0.6: U2.5@13.674,32.241 13.3,31.867 13.3,30.875 C4.2@14.626,29.549 R1.2@15.566,30.49 ; R1.2@15.602,30.49 TP2.1@16.68,29.411
  Bottom Layer w0.5: v1(-5.484,19.434) -6.25,20.2 -6.25,21.35 -4.15,23.45 -3.525,23.45 ; v1(-1.95,21.875) -3.525,23.45 ; v1(1.4,27.694) 1.398,27.694 0.317,28.775 -1,28.775 -3.525,26.25 -3.525,23.45 ; v1@4.769,21.344 6.675,23.25 ; v1(6.675,25.65) 6.675,23.25 ; v1(8.454,20.25) 8.454,22.721 7.925,23.25 6.675,23.25
BTN: C5.1 IC1.30 R7.2 | length 3.4
  Top Layer w0.254: IC1.30@1.202,19.263 1.542,19.603 1.622,19.683 1.622,19.985 1.876,20.239 1.876,20.424 C5.1@1.827,20.473
  Top Layer w0.5: C5.1@1.826,20.474 2.131,20.474 2.688,21.03 3.116,21.03 3.134,21.013 3.151,21.03 R7.2@3.47,21.03
DEBUG_UART_RX: IC1.17 J1.8 | length 40.8
  Top Layer w0.254: v1(-17.375,24.575) -17.375,23.179 -6.727,12.531 -6.727,11.877 v1(-6.7,11.85) ; J1.8@-13.979,33.125 v1(-13.179,32.325) ; IC1.17@0.495,14.03 1.21,13.315 1.21,12.89 v1(1.225,12.875)
  Bottom Layer w0.254: v1(-17.375,24.575) -15.1,24.575 -10.875,28.8 -10.875,30.021 v1(-13.179,32.325) ; v1(-6.7,11.85) 0.2,11.85 v1(1.225,12.875)
DEBUG_UART_TX: IC1.2 J1.6 | length 38.3
  Top Layer w0.254: v1(-18.45,25.95) -18.45,23.325 -7.794,12.669 v1(-7.794,12.635) ; J1.6@-15.775,31.329 v1(-14.925,30.479) ; IC1.2@-0.849,19.616 -1.131,19.899 -1.211,19.979 -1.211,20.302 -0.764,20.75 -0.322,20.75 -0.037,20.465 v1(0,20.465)
  Bottom Layer w0.254: v1(-18.45,25.95) -18.443,25.95 -14.925,29.468 v1(-14.925,30.479) ; v1(-7.794,12.635) -7.794,12.651 0,20.445 v1(0,20.465)
EN_3V3: IC1.27 U2.3 | length 18
  Top Layer w0.254: IC1.27@2.263,18.202 2.552,18.491 3.022,18.491 3.31,18.204 4.629,18.204 5.871,19.446 6.405,19.446 6.7,19.741 6.7,20.659 7.317,21.276 7.714,21.276 11.5,25.062 11.5,28.723 U2.3@12.578,29.801
GND: BT1.2 C1.1 C2.1 C3.1 C4.1 C5.2 C6.1 C7.1 IC1.1 IC1.3 IC1.5 IC1.15 IC1.16 IC1.20 IC1.26 IC1.28 IC1.29 IC1.31 IC1.32 IC1.33 J1.3 J1.5 R3.1 R11.1 U2.2 | length 56.9
  Top Layer w0.254: J1.5@-16.673,32.227 -17.725,33.279 -17.725,34.2 v1(-17.188,34.737) -16.8,35.125 -15.979,35.125 J1.3@-14.877,34.023 ; v1(-5.256,20.805) -4.477,20.026 C6.1@-4.474,20.026 ; C7.1@-2.974,19.626 -2.118,18.771 IC1.5@-2.118,18.768 ; IC1.5@-1.7,18.344 0,16.644 IC1.33@0,16.5 ; IC1.3@-1.202,19.263 IC1.33@0,18.061 ; IC1.15@-0.849,14.384 IC1.33@-0.173,15.059 ; IC1.16@-0.495,14.03 0,14.525 IC1.33@0,15.437 ; IC1.1@-0.495,19.97 IC1.33@0,19.475 ; IC1.33@-0.088,15.004 -0.142,15.059 -0.142,15.295 IC1.33@0,15.437 ; IC1.33@0,17.5 v1(0,18) IC1.33@0,18.061 ; IC1.33@0.063,15.5 IC1.33@0,15.437 ; IC1.32@0.284,19.759 IC1.33@0,19.475 ; IC1.31@0.849,19.616 IC1.33@0,18.768 ; IC1.20@1.345,15.302 IC1.33@0.146,16.5 ; IC1.28@1.909,18.556 0.354,17 v1(0,17) ; IC1.26@2.616,17.849 1.268,16.5 IC1.33@0.146,16.5 ; C5.2@2.774,19.526 2.589,19.526 2.535,19.58 2.481,19.526 2.173,19.526 0,17.354 v1(0,17) ; C5.2@2.974,19.626 v1(3.65,18.95) ; IC1.33@0,15.437 v1(0,16) IC1.33@0,16.5 ; IC1.33@0,16.5 IC1.33@0.146,16.5 ; v1(0,17) 0.073,16.927 0.073,16.573 IC1.33@0.146,16.5 ; IC1.33@0,18.061 IC1.33@0,18.768 ; IC1.33@0,18.768 IC1.33@0,19.475
  Top Layer w0.5: C6.1@-4.474,20.026 -4.255,20.026 -3.855,19.626 -3.285,19.626 -3.239,19.672 -3.02,19.672 C7.1@-2.974,19.626 ; v1@-3.506,7.106 -2.785,6.385 C2.1@-2.065,6.385 ; C2.1@-1.655,5.975 C2.1@-1.638,5.975 ; v1(-1.586,23.637) -0.75,22.801 R11.1@-0.75,21.8 ; C1.1@2.1,6.18 2.34,6.18 3.466,7.306 3.506,7.306 v1(3.525,7.325)
  Top Layer w0.6: v1(11,29.55) 11,29.567 U2.2@11.906,30.473 12.563,31.129 12.563,31.626 C3.1@11.185,33.004 ; v1(12.675,27.6) 12.676,27.6 C4.1@13.466,28.39 ; R3.1@14.452,33.796 v1(15.325,34.669)
  Top Layer w0.8: v2(-8,27.425) -1.061,27.425 -0.818,27.182 -0.182,27.182 BT1.2@0,27
  other v1: -3.525,7.125 4.414,8.637 8.914,11.637 10.414,11.637 -5.336,16.137 -1,17 1,17 8.914,17.637 10.414,17.637 11.164,19.137 14.164,19.137 -19.586,20.637 -13.586,20.637 11.914,20.637 -8.45,21.1 -20.336,22.137 12.664,22.137 17.164,22.137 -16.586,23.637 -12.086,23.637 -10.586,23.637 8.914,23.637 14.914,23.637 -12.836,25.137 15.664,25.137 21.664,25.137 -19.586,26.637 -9.086,26.637 1.414,26.637 4.414,26.637 13.414,26.637 17.914,26.637 -20.336,28.137 -18.836,28.137 -12.836,28.137 9.664,28.137 -19.586,29.637 8.914,29.637 17.914,29.637 -5.336,31.137 -18.086,32.637 -7.586,32.637 -11.336,34.137 2.164,34.137 3.664,34.137 6.664,34.137 8.164,34.137 -10.586,35.637 -9.086,35.637 -1.586,35.637 2.914,35.637 8.914,35.637 10.414,35.637 11.914,35.637 3.664,37.137 6.664,37.137 9.664,37.137 11.164,37.137 12.664,37.137 14.164,37.137 15.664,37.137 17.164,37.137 -7.2,37.85 -13.586,41.637 -12.086,41.637 -10.586,41.637
LED_A.0: IC1.7 R2.2 | length 5.6
  Top Layer w0.254: R2.2@-7.8,18.15 -4.916,18.15 -4.904,18.138 -2.913,18.138 IC1.7@-2.421,17.646
LED_A.1: IC1.8 R4.2 | length 4.1
  Top Layer w0.254: R4.2@-6.5,16.45 -6.475,16.45 -5.221,17.704 -3.179,17.704 IC1.8@-2.97,17.495
LED_A.2: IC1.9 R5.2 | length 2.5
  Top Layer w0.254: R5.2@-5.2,15.05 -4.428,15.05 IC1.9@-3.182,16.296
LED_A.3: IC1.10 R6.2 | length 3.2
  Top Layer w0.254: R6.2@-3.9,13.75 -3.9,14.868 IC1.10@-2.401,16.366
LED_K.0: IC1.11 R8.1 | length 3.3
  Top Layer w0.254: R8.1@-2.6,12.75 -2.725,12.875 -2.725,15.336 IC1.11@-2.263,15.798
LED_K.1: IC1.12 R12.1 | length 4.4
  Top Layer w0.254: IC1.12@-1.909,15.444 -1.909,15.442 -2.338,15.013 -2.338,13.761 -1.3,12.723 R12.1@-1.3,11.65
LED_K.2: IC1.13 R15.1 | length 5.4
  Top Layer w0.254: IC1.13@-1.556,15.091 -1.556,15.088 -1.957,14.687 -1.957,13.918 0,11.962 R15.1@0,10.65
LED_K.3: IC1.14 R9.1 | length 4.4
  Top Layer w0.254: IC1.14@-1.411,14.525 -1.576,14.361 -1.576,14.151 0.3,12.275 0.675,12.275 0.927,12.023 0.927,11.998 1.275,11.65 R9.1@1.3,11.65
LED_K.4: IC1.18 R13.1 | length 2.5
  Top Layer w0.254: IC1.18@0.849,14.384 2.227,13.005 2.227,12.998 2.575,12.65 R13.1@2.6,12.65
LED_K.5: IC1.19 R16.1 | length 3.1
  Top Layer w0.254: IC1.19@1.202,14.737 1.739,14.2 3.425,14.2 3.875,13.75 R16.1@3.9,13.75
LED_K.6: IC1.21 R10.1 | length 3.6
  Top Layer w0.254: IC1.21@1.909,15.444 2.454,14.9 5.05,14.9 R10.1@5.2,15.05
LED_K.7: IC1.22 R14.1 | length 4.9
  Top Layer w0.254: IC1.22@2.263,15.798 2.736,15.325 4.125,15.325 5.25,16.45 R14.1@6.5,16.45
LED_K.8: IC1.23 R17.1 | length 6.4
  Top Layer w0.254: IC1.23@2.616,16.151 2.619,16.151 3.065,15.706 3.931,15.706 6.528,18.303 R17.1@7.753,18.303
NetD1_1: D1.1 D4.1 D7.1 D10.1 R15.2 | length 75.8
  Top Layer w0.254: -23.475,26.775 -23.475,26.275 -6.35,9.15 R15.2@0,9.15 ; D10.1@-22.67,30.33 -22.67,30.959 ; D7.1@-17.175,40.335 -17.175,40.9 ; D7.1@-17.17,40.33 -16.57,40.33 ; -4.603,40.078 -4.57,40.045 D4.1@-4.57,39.53 -4.082,39.53 -4.056,39.556 ; -1.925,34.75 -0.619,33.444 0.106,33.444 0.33,33.22 D1.1@0.33,32.83
  Top Layer w0.5: -23.475,26.775 -23.475,27.511 -23.9,27.936 -23.9,32.287 -23.358,32.829 -22.768,32.829 ; -22.67,30.959 -22.208,31.421 -22.208,32.345 -22.692,32.829 -22.768,32.829 ; -17.175,40.9 -18.338,40.9 -19.175,40.063 -19.175,39.425 -22.768,35.832 -22.768,32.829 ; -16.57,40.33 -16.175,40.725 -5.25,40.725 -4.603,40.078 ; -4.056,39.556 -3.619,39.119 -3.619,36.444 -1.925,34.75
NetD1_2: D1.2 D4.2 D7.2 D10.2 R12.2 | length 73.1
  Top Layer w0.254: -22.781,26.581 -22.781,26.12 -6.811,10.15 R12.2@-1.3,10.15 ; D10.2@-22.67,29.669 -22.181,29.669 v1(-21.6,30.25) ; D7.2@-17.17,39.669 -17.165,39.674 -15.83,39.674 v1@-15.825,39.679 ; v1@-4.571,37.876 -4.573,37.877 v1(-4.573,37.949) -4.573,38.867 D4.2@-4.57,38.869 ; D1.2@0.33,32.169 v1@1.016,32.169
  Top Layer w0.5: -22.781,26.581 v1(-22.781,28.046) ; v1(-21.6,30.25) -21.6,30.277 -21.45,30.427 -21.45,36.038 -19.369,38.119 v1(-19.344,38.119) ; v1(-15.825,39.717) -7.239,39.717 -7.056,39.9 v1(-7.029,39.9) ; v1@-4.571,37.876 -4.571,36.284 v1(-2.256,33.969)
  Bottom Layer w0.5: v1(-22.781,28.046) -22.781,29.069 v1(-21.6,30.25) ; v1(-19.344,38.119) -19.356,38.131 -19.356,39.234 -18.866,39.724 -15.832,39.724 v1(-15.825,39.717) ; v1@-7.061,39.867 -6.554,40.375 -5.712,40.375 -4.575,39.238 -4.575,37.951 v1(-4.573,37.949) ; v1(-2.256,33.969) -1.364,33.969 0.276,32.329 v1(1.269,32.329)
NetD1_3: D1.3 D4.3 D7.3 D10.3 R8.2 | length 65.4
  Top Layer w0.254: D10.3@-23.331,29.669 -23.331,29.158 -23.273,29.1 ; -21.775,26.15 -21.775,25.653 -7.272,11.15 R8.2@-2.6,11.15 ; D7.3@-17.831,39.669 -17.82,39.659 -17.82,39.329 -17.403,38.913 ; -5.74,38.869 D4.3@-5.231,38.869 ; -1.181,32.169 D1.3@-0.331,32.169
  Top Layer w0.5: -23.273,29.1 -23.023,28.85 -21.775,28.85 ; -21.775,26.15 -21.775,28.85 ; -17.403,38.913 -20.65,35.666 -20.65,29.975 -21.775,28.85 ; -17.353,38.913 -6.674,38.913 -6.408,38.647 -5.963,38.647 ; -5.74,38.869 -5.963,38.647 ; -1.181,32.169 -1.838,32.169 -5.4,35.731 -5.4,37.639 -5.963,38.202 -5.963,38.647
NetD1_4: D1.4 D2.4 D3.4 Q2.3 | length 56.6
  Top Layer w0.254: D2.4@-18.831,19.03 v1(-18.831,20.006) ; v1(-7.575,22.717) -7.509,22.651 -7.509,22.378 -7.331,22.2 Q2.3@-6.7,22.2 ; v1@-4.775,29.896 -4.775,29.894 -4.121,29.24 3.303,29.24 3.638,29.575 v1(6.775,29.575) ; v1(-1.566,33.034) -1.472,33.034 -1.268,32.83 D1.4@-0.331,32.83 ; v1(17.2,18.996) 17.217,19.013 18.153,19.013 D3.4@18.169,19.03
  Bottom Layer w0.5: v1(-18.831,20.006) -16.119,22.717 v1(-7.575,22.717) ; v1@-7.575,22.69 -5.768,24.497 -5.768,28.941 -4.776,29.933 -4.667,29.933 v1@-1.585,33.015 ; v1(6.775,29.575) 6.775,29.512 17.2,19.087 v1(17.2,18.996)
  other v1: -4.795,29.914
NetD2_1: D2.1 D5.1 D8.1 D11.1 R16.2 | length 45.3
  Top Layer w0.254: D2.1@-18.17,19.03 -17.68,19.03 -17.325,18.675 -17.325,18.118 ; -9.794,10.553 -9.67,10.43 D5.1@-9.67,9.83 -9.037,9.83 ; D8.1@0.33,2.53 0.33,3.12 ; D11.1@10.33,9.83 10.33,10.37
  Top Layer w0.5: -17.325,18.118 -9.794,10.586 -9.794,10.553 ; -9.037,9.83 -7.83,9.83 -3.263,5.263 -0.371,5.263 0.33,4.562 ; 0.33,3.12 0.33,4.562 ; R16.2@3.9,12.25 6.168,12.25 7.693,10.725 ; 10.33,10.37 9.975,10.725 7.693,10.725 ; 0.33,4.562 1.031,5.263 2.938,5.263 6.38,8.705 6.38,8.714 6.825,9.159 6.825,9.857 7.693,10.725
NetD2_2: D2.2 D5.2 D8.2 D11.2 R13.2 | length 49.5
  Top Layer w0.254: -18.17,17.781 D2.2@-18.17,18.369 ; D5.2@-9.67,9.169 -9.001,9.169 -8.823,8.991 v1(-8.729,8.991) ; 0.316,1.315 0.316,1.856 D8.2@0.33,1.869 0.869,1.869 ; 10.33,8.655 D11.2@10.33,9.169
  Top Layer w0.5: -18.17,17.781 v1(-11.779,11.39) ; v1(-8.729,8.991) -8.041,8.991 -3.525,4.475 -2.45,4.475 -2.025,4.05 -2.025,2.487 -0.853,1.315 0.316,1.315 ; 0.869,1.869 1.986,2.986 3.074,2.986 v1(8.536,8.448) ; R13.2@2.6,11.15 5.848,11.15 6.373,10.625 v1(6.4,10.625) ; v1@8.525,8.45 10.125,8.45 10.33,8.655
  Bottom Layer w0.5: v1(-11.779,11.39) -11.779,10.253 -10.517,8.991 v1(-8.729,8.991) ; v1(6.4,10.625) 6.4,10.605 8.536,8.469 v1(8.536,8.448)
NetD2_3: D2.3 D5.3 D8.3 D11.3 R9.2 | length 46.6
  Top Layer w0.254: -18.833,17.597 D2.3@-18.833,18.367 ; -11.021,9.487 -10.704,9.169 D5.3@-10.331,9.169 -10.332,9.168 -10.332,8.817 -9.965,8.45 ; v1(-1.126,2.725) -1.06,2.659 -1.06,2.235 -0.694,1.869 D8.3@-0.331,1.869 ; v1@7.175,8.381 7.175,8.475 7.6,8.9 7.869,9.169 D11.3@9.669,9.169
  Top Layer w0.5: -18.833,17.597 -18.833,17.299 -11.021,9.487 ; -9.965,8.45 -9.69,8.175 -8.275,8.175 -3.771,3.671 v1(-2.884,3.671) ; R9.2@1.3,10.15 5.429,10.15 5.692,9.888 v1(5.719,9.888) ; v1(2.6,3.79) 2.6,3.794 7.184,8.378 v1(7.184,8.381)
  Bottom Layer w0.5: v1(-2.884,3.671) -1.958,2.744 -1.145,2.744 v1(-1.126,2.725) 1.535,2.725 v1(2.6,3.79) ; v1(5.719,9.888) 7.165,8.442 7.165,8.4 v1(7.184,8.381)
NetD3_1: D3.1 D6.1 D9.1 D12.1 R17.2 | length 52.7
  Top Layer w0.254: D12.1@5.23,39.53 5.655,39.53 5.762,39.637 ; D9.1@17.83,40.33 18.395,40.33 ; D9.1@17.837,40.337 17.837,40.804 ; D3.1@18.83,19.03 18.83,19.545 ; v1(23.034,31.171) 23.062,31.171 23.33,30.904 D6.1@23.33,30.33
  Top Layer w0.5: 5.762,39.637 7.15,41.025 17.617,41.025 17.837,40.804 ; R17.2@7.8,16.65 13.525,16.65 16.675,19.8 18.575,19.8 18.83,19.545 19.531,20.246 19.531,20.75 ; 18.395,40.33 18.8,39.925 18.8,39.125 22.279,35.646 v1(22.279,32.87) ; 19.525,20.75 19.525,26.077 v1(22.187,28.738)
  Bottom Layer w0.5: v1(22.187,28.738) 23.015,29.567 23.015,31.157 23.034,31.157 23.015,31.176 23.015,32.121 22.279,32.857 v1(22.279,32.87)
NetD3_2: D3.2 D6.2 D9.2 D12.2 R14.2 | length 56.5
  Top Layer w0.254: D12.2@5.23,38.869 5.958,38.869 ; D9.2@17.83,39.669 17.83,39.114 17.975,38.969 v1(17.975,38.875) ; 18.75,17.85 18.83,17.93 D3.2@18.83,18.369 19.237,18.369 19.36,18.492 ; 23.33,29.095 D6.2@23.33,29.669 23.844,29.669 23.875,29.7
  Top Layer w0.5: 5.958,38.869 7.309,40.221 v1(15.075,40.221) ; R14.2@6.5,14.95 13.725,14.95 13.725,14.975 15.6,16.85 17.75,16.85 18.75,17.85 ; v1(17.975,38.875) 21.475,35.375 21.475,32.537 22.037,31.975 23.399,31.975 23.875,31.499 23.875,29.7 ; 19.36,18.492 20.275,19.407 20.275,25.625 23.33,28.68 23.33,29.095
  Bottom Layer w0.5: v1(15.075,40.221) 15.075,40.732 15.368,41.025 16.6,41.025 17.956,39.669 17.956,38.894 v1(17.975,38.875)